# Altium PCB INVERTER_Logic_noCutout.pcbdoc (part 1 of 2)
Units mil, origin at the board's own origin, x right, y up, seen from the top; angles counter-clockwise.
Board outline 4675.98 x 2297.64 mil, 2 copper layers (Top Layer, Bottom Layer), stack 64.567 mil thick; 154 components, 177 nets, 511 pads, 163 vias.
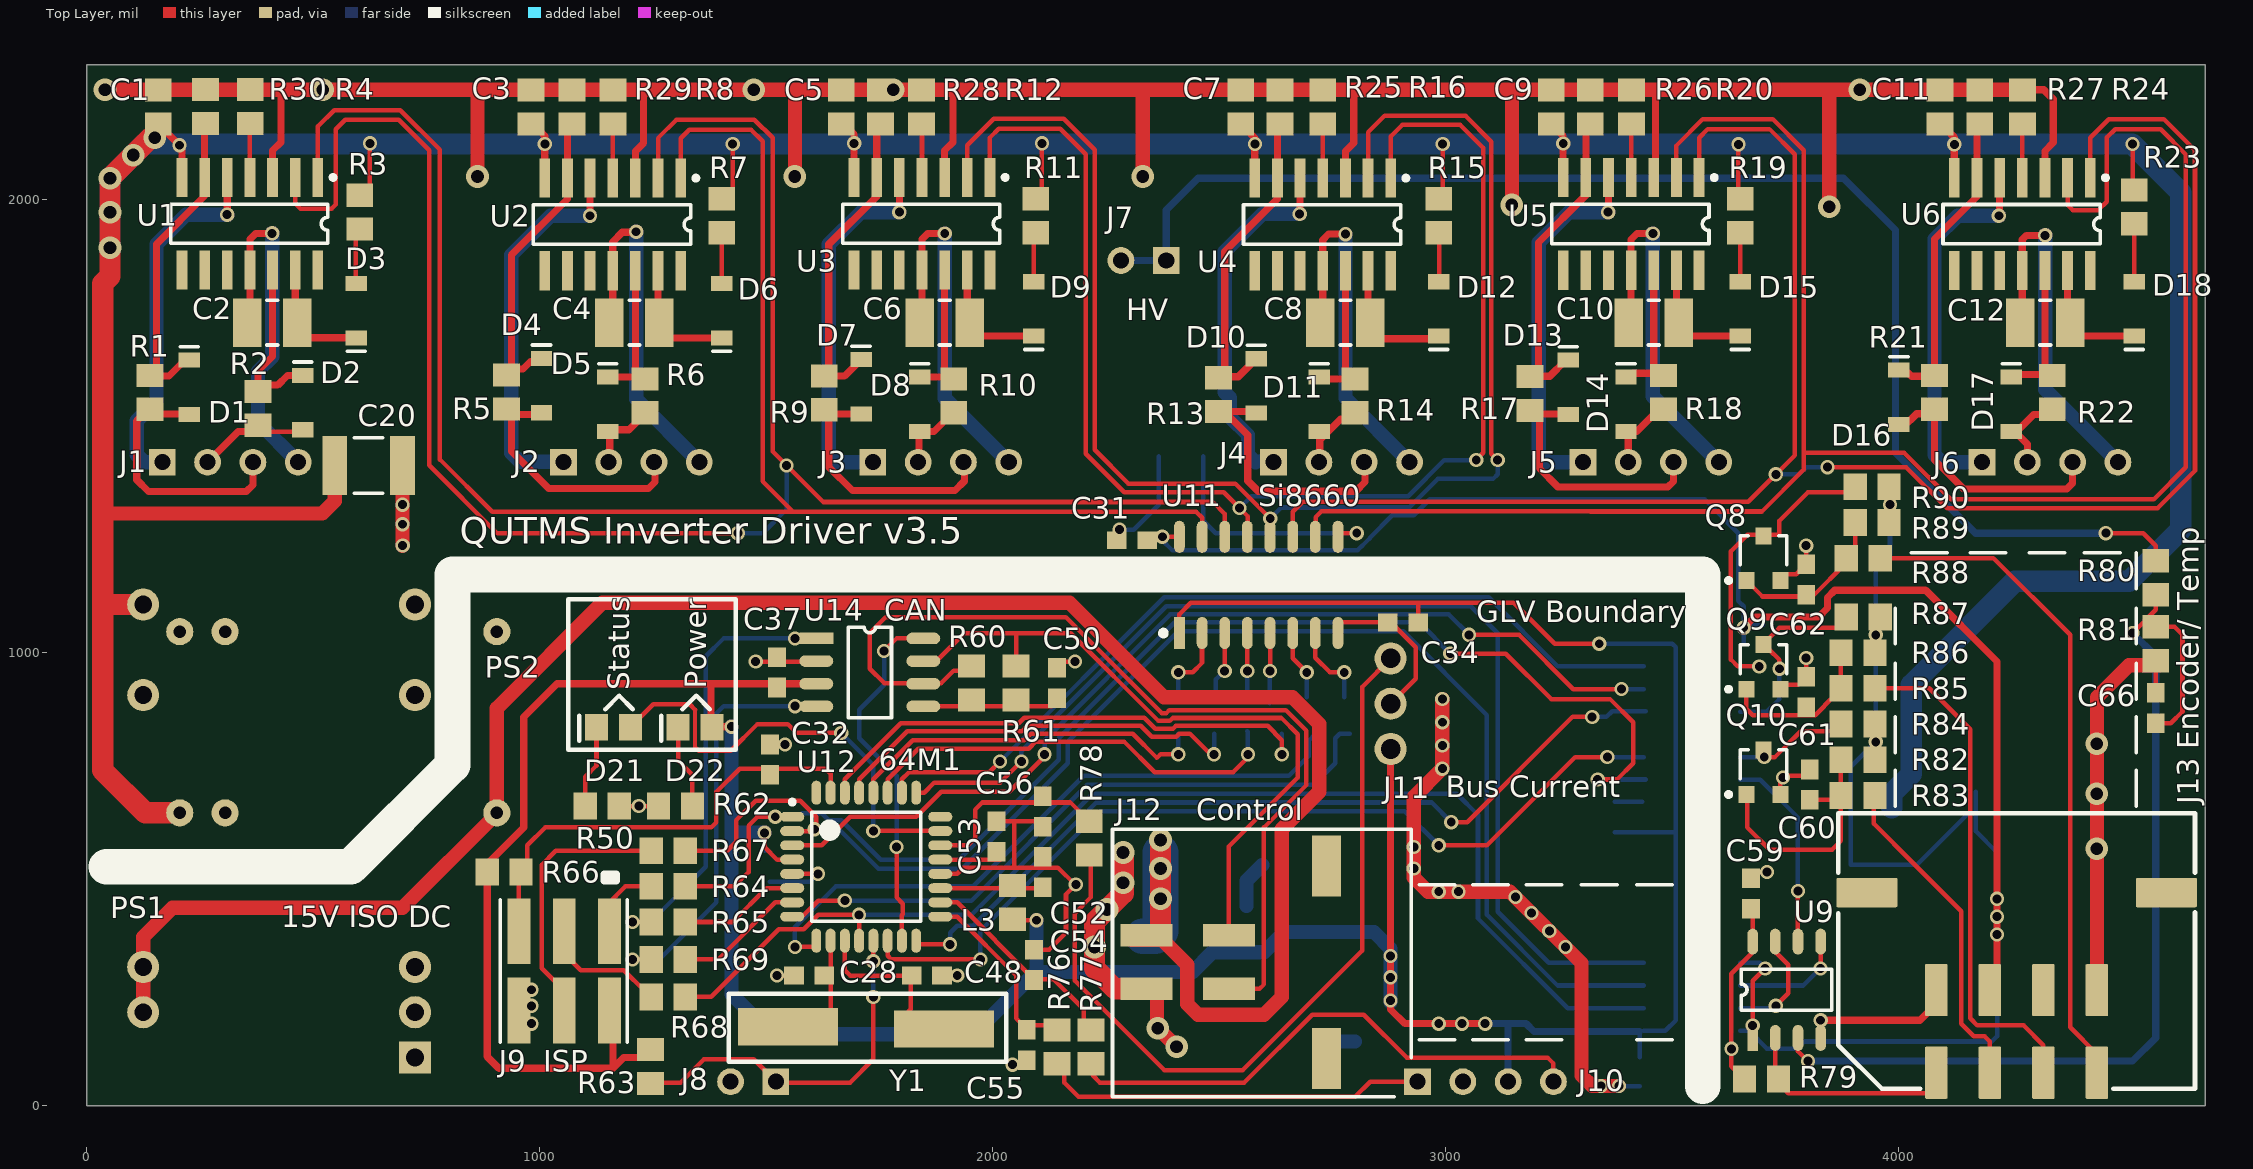
[diagram p0: Top Layer view]
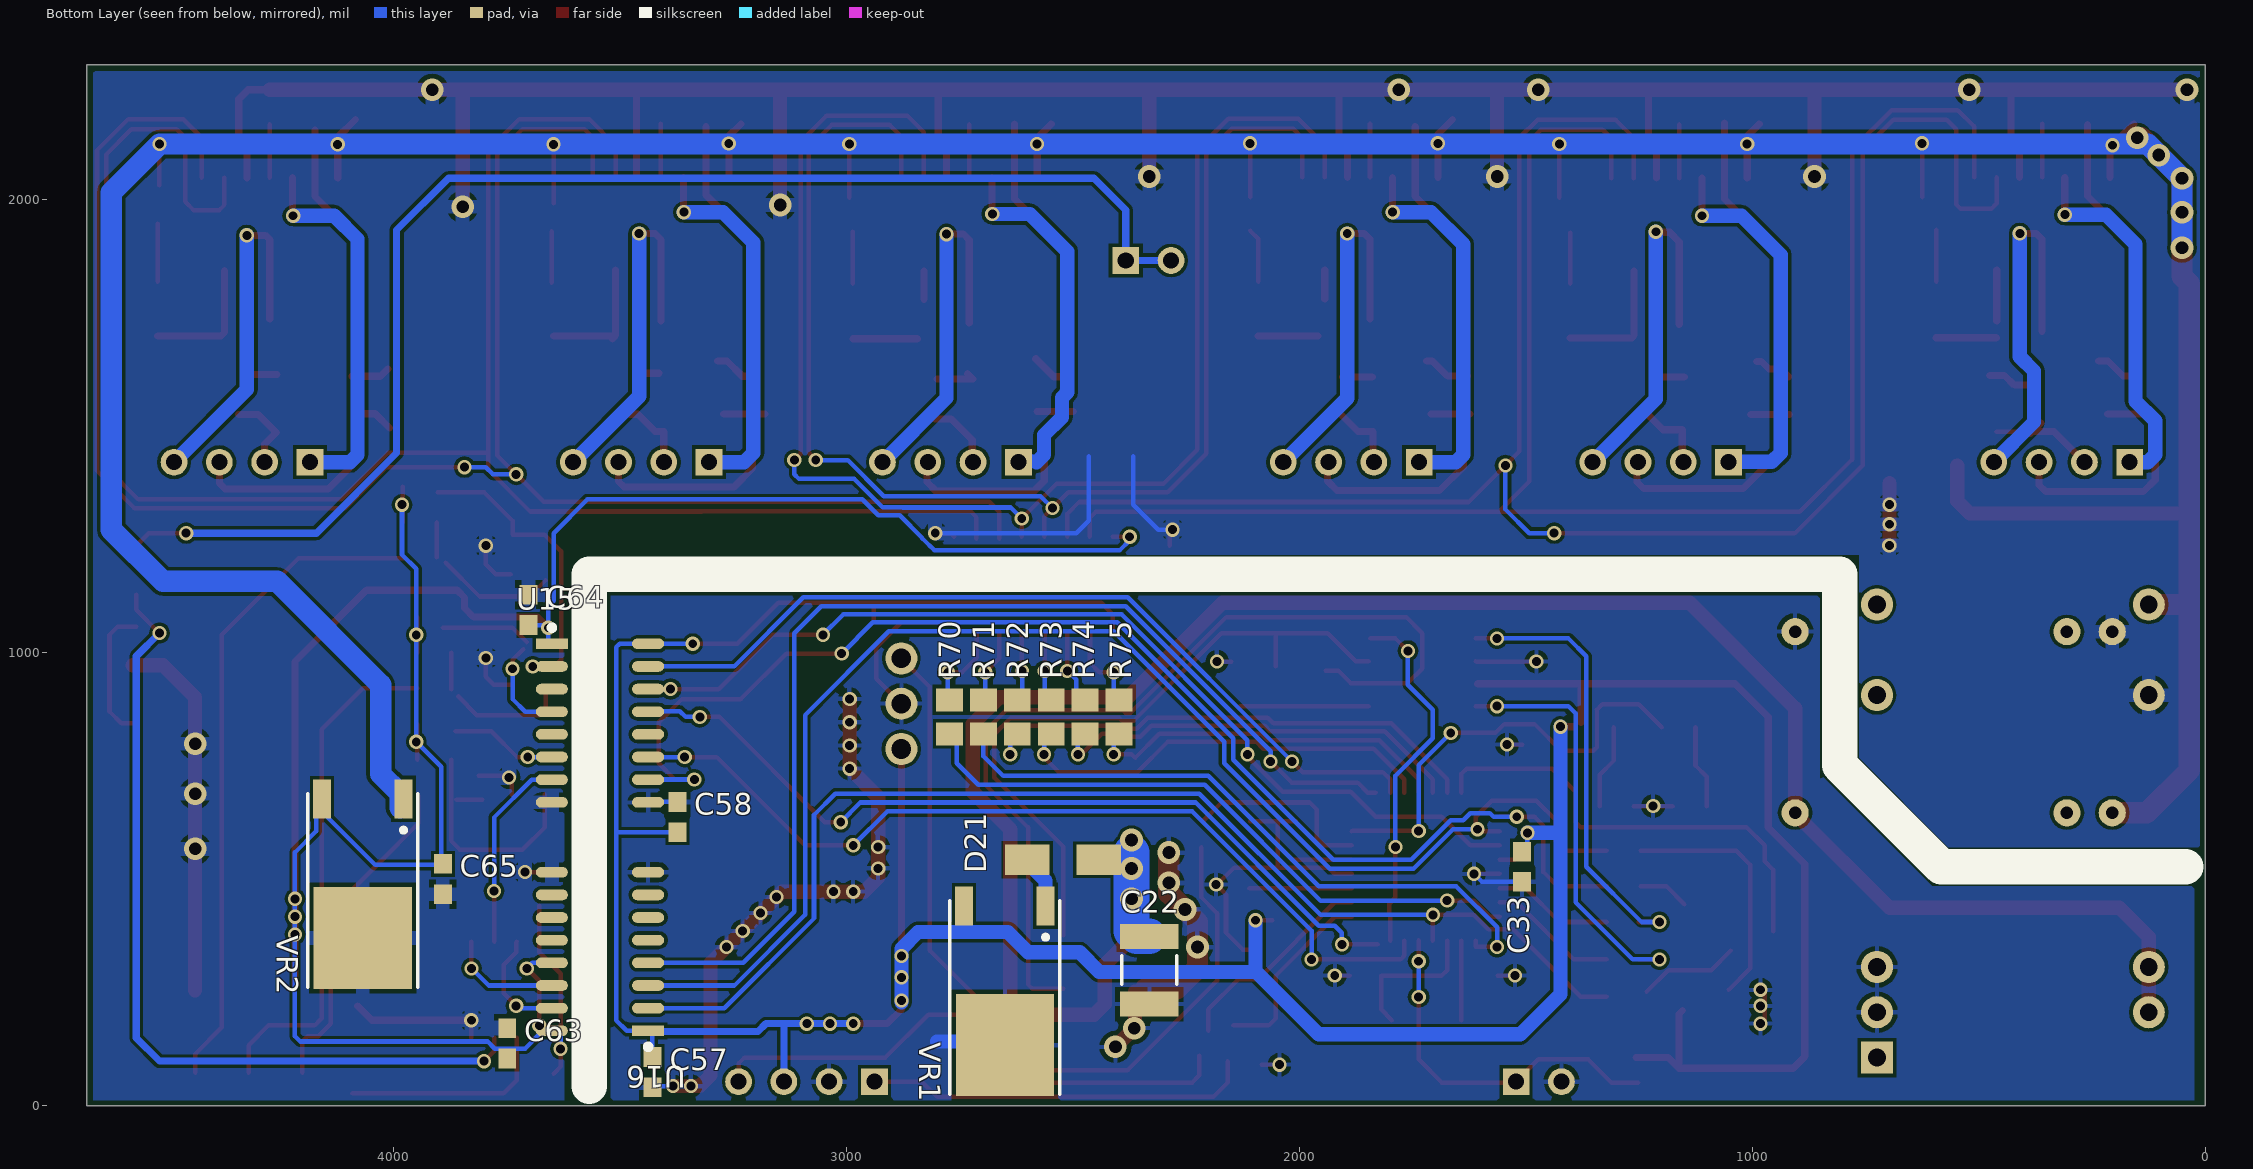
[diagram p1: Bottom Layer view, seen from below]

## Layer stack, top to bottom
Top Solder: solder mask 0.4, Solder Resist, Dk 3.5
Top Layer: signal copper 2.7559
Dielectric1: core 59.0551, FR-4, Dk 4.8
Bottom Layer: signal copper 2.7559
Bottom Solder: solder mask 0.4, Solder Resist, Dk 3.5

## Board outline
0,0 0,2297.64 4675.98,2297.64 4675.98,0

## Design rules (kind name [scope] priority, off if disabled: settings)
Clearance "Shrimp Clear" [InComponent('CS3')] p1: gap=39.37 ignorepadtopadclearanceinfootprint=FALSE except(0: Arc-Hole Track-Hole SMDPad-Hole THPad-Hole Via-Hole Fill-Hole Poly-Hole Region-Hole Text-Hole)
Clearance [All] p2: gap=7.48 ignorepadtopadclearanceinfootprint=FALSE except(0: Arc-Hole Track-Hole SMDPad-Hole THPad-Hole Via-Hole Fill-Hole Poly-Hole Region-Hole Text-Hole)
Height [All] p1: minheight=0 maxheight=1181.1 prefheight=500
HoleSize [All] p1: absolutevalues=TRUE maxlimit=393.7 minlimit=1 maxpercent=80.000 minpercent=20.000
MinimumSolderMaskSliver [All] p1: minsoldermaskwidth=6.3
PlaneClearance [All] p1: clearance=39.37
PlaneConnect [All] p1: planeconnectstyle=Direct reliefexpansion=20 reliefentries=4 reliefconductorwidth=10 reliefairgap=10
PolygonConnect GLV_ground_connect [InNet('GND_GLV')] p1: connectstyle=Relief reliefconductorwidth=10 reliefentries=4 polygonreliefangle="90 Angle" airgapwidth=10
PolygonConnect "Rear Cap Connect" [(InNet('HV_NEG') AND (InComponent('C30') OR InComponent('C31') OR InComponent('C32') OR InComponent('C33') OR InComponent('C34') OR InComponent('C35') OR InComponent('C36') OR InComponent('C37') OR InComponent('C38') OR InComponent('C39') OR InComponent('C40') OR InComponent('C41') OR InComponent('C42') OR InComponent('C43') OR InComponent('C44') OR InComponent('C45') OR InComponent('C46') OR InComponent('C47') OR InComponent('C48') OR InComponent('C49') OR InComponent('C50') OR InComponent('C51') OR InComponent('C52') OR InComponent('C53') OR InComponent('C54') OR InComponent('C55') OR InComponent('C56') OR InComponent('C57')))] p2: connectstyle=Relief reliefconductorwidth=10 reliefentries=4 polygonreliefangle="90 Angle" airgapwidth=10
PolygonConnect [All] p3: connectstyle=Relief reliefconductorwidth=31.5 reliefentries=4 polygonreliefangle="90 Angle" airgapwidth=10
RoutingVias [All] p1: holewidth=19.68 width=31.5 viastyle="Through Hole" minholewidth=19.68 minwidth=31.5 maxholewidth=393.7 maxwidth=393.7
SilkToSilkClearance [All] p1: silktosilkclearance=6.3
SilkToSolderMaskClearance SilkscreenOverComponentPads [IsPad] p1: minsilkscreentomaskgap=6.3 clearancetoexposedcopper=TRUE
SolderMaskExpansion [IsVia] p1: expansion=-39.37
Width [All] p1: maxlimit=393.7 minlimit=7.87 preferedwidth=10
23 further rules are at their usual default settings.

## Components (designator, comment, footprint, x,y, rotation, side; value= is the part's Value field where it differs from the comment)
C1 "0805 1uF cer" 2012[0805]#1 157.48,2204.72 r270 top
C2 "1210 3.3uF 50V" 3225[1210] 409.45,1728.35 r180 top
C3 "0805 1uF cer" 2012[0805]#1 980.32,2204.72 r270 top
C4 "1210 3.3uF 50V" 3225[1210] 1208.66,1728.35 r180 top
C5 "0805 1uF cer" 2012[0805]#1 1665.35,2204.72 r270 top
C6 "1210 3.3uF 50V" 3225[1210] 1893.5,1728.35 r180 top
C7 "0805 1uF cer" 2012[0805]#1 2547.24,2204.72 r270 top
C8 "1210 3.3uF 50V" 3225[1210] 2778.15,1728.35 r180 top
C9 "0805 1uF cer" 2012[0805]#1 3232.28,2204.72 r270 top
C10 "1210 3.3uF 50V" 3225[1210] 3458.86,1728.35 r180 top
C11 "0805 1uF cer" 2012[0805]#1 4090.55,2204.72 r270 top
C12 "1210 3.3uF 50V" 3225[1210] 4322.83,1728.35 r180 top
C20 "Comment" 1812 622.05,1413.39 r0 top
C22 "1812 2.2uF 25V" 1812 2330.71,299.21 r270 bottom
C28 "0603 18pF" 1608[0603] 1594.49,287.4 r0 top
C31 "0603 18pF" 1608[0603] 2307.09,1248.03 r0 top
C32 "0603 18pF" 1608[0603] 1507.87,763.78 r270 top
C33 "0603 18pF" 1608[0603] 1507.87,527.56 r90 bottom
C34 "0603 18pF" 1608[0603] 2905.51,1066.93 r0 top
C37 "Comment" 1608[0603] 1523.62,956.69 r270 top
C48 "0603 18pF" 1608[0603] 1854.33,287.4 r0 top
C50 "Comment" 1608[0603] 2141.73,933.07 r270 top
C52 "Comment" 1608[0603] 2110.24,515.75 r270 top
C53 "Comment" 1608[0603] 2007.87,594.49 r270 top
C54 "Comment" 1608[0603] 2090.55,311.02 r270 top
C55 "Comment" 1608[0603] 2074.8,133.86 r270 top
C56 "Comment" 1608[0603] 2110.24,649.61 r270 top
C57 "Comment" 1608[0603] 3427.56,74.02 r270 bottom
C58 "Comment" 1608[0603] 3372.44,637.01 r270 bottom
C59 "Comment" 1608[0603] 3673.23,468.5 r90 top
C60 "Comment" 1608[0603] 3803.15,708.66 r270 top
C61 "Comment" 1608[0603] 3795.28,913.39 r270 top
C62 "Comment" 1608[0603] 3795.28,1161.42 r270 top
C63 "Comment" 1608[0603] 3748.03,137.8 r270 bottom
C64 "Comment" 1608[0603] 3700.79,1094.49 r270 bottom
C65 "Comment" 1608[0603] 3890.16,500.39 r270 bottom
C66 "Comment" 1608[0603] 4566.93,877.95 r270 top
D1 "RF071M2S" 0402 225.98,1620.47 r270 top
D2 "RF071M2S" 0402 476.38,1586.61 r270 top
D3 "RF071M2S" 0402 594.49,1720.47 r90 top
D4 "RF071M2S" 0402 1003.54,1624.02 r270 top
D5 "RF071M2S" 0402 1149.61,1582.68 r270 top
D6 "RF071M2S" 0402 1401.57,1720.47 r90 top
D7 "RF071M2S" 0402 1709.06,1621.26 r270 top
D8 "RF071M2S" 0402 1838.58,1582.68 r270 top
D9 "RF071M2S" 0402 2090.55,1724.41 r90 top
D10 "RF071M2S" 0402 2581.5,1623.23 r270 top
D11 "RF071M2S" 0402 2720.47,1582.68 r270 top
D12 "RF071M2S" 0402 2984.25,1724.41 r90 top
D13 "RF071M2S" 0402 3270.08,1620.47 r270 top
D14 "RF071M2S" 0402 3397.64,1582.68 r270 top
D15 "RF071M2S" 0402 3649.61,1724.41 r90 top
D16 "RF071M2S" 0402 4000,1598.43 r270 top
D17 "RF071M2S" 0402 4248.03,1582.68 r270 top
D18 "RF071M2S" 0402 4519.69,1724.41 r90 top
D21 "0805 Red LED" 2012[0805]#1 1162.44,835.47 r0 top
D21 "Comment" 2012[0805]#2 2570.87,543.31 r180 bottom
D22 "0805 Grn LED" 2012[0805]#1 1342.44,835.47 r0 top
J1 "A26416-ND" HDR1X4 166.54,1420.47 r0 top locked
J2 "A26416-ND" HDR1X4 1051.97,1420.47 r0 top
J3 "A26416-ND" HDR1X4 1735.04,1420.47 r0 top
J4 "A26416-ND" HDR1X4 2619.69,1420.47 r0 top
J5 "A26416-ND" HDR1X4 3302.36,1420.47 r0 top
J6 "A26416-ND" HDR1X4 4183.46,1420.47 r0 top
J7 "A32932-ND" HDR1X2 2382.68,1865.75 r180 top locked
J8 "A32932-ND" HDR1X2 1520.87,53.15 r180 top locked
J9 "ISP" SOT23-6 1062.99,314.96 r180 top
J10 "A26416-ND" HDR1X4 2937.4,53.15 r0 top locked
J11 "Bus Current" MOLEX_22-05-3081 2877.95,787.4 r180 top locked
J12 "43045-0418" SO8 2811.02,185.24 r90 top locked
J13 "Comment" MOLEX_8PIN_RA_SMD 4259.84,271.65 r0 top
L3 "0805 10uH" 2012[0805]#1 2043.31,448.82 r90 top
PS1 "15V ISO DC" DC/DC_JSE08 555.12,846.46 r270 top
PS2 "Comment" Recom_DIP24 724.41,106.3 r180 top
Q8 "2N7002" SOT-23 3700.79,1208.66 r0 top
Q9 "2N7002" SOT-23 3700.79,968.5 r0 top
Q10 "2N7002" SOT-23 3700.79,736.22 r0 top
R1 "0805 22R" 2012[0805]#1 139.37,1574.8 r270 top
R2 "0805 22R" 2012[0805]#1 377.95,1539.37 r90 top
R3 "0805 10R" 2012[0805]#1 602.36,1972.44 r90 top
R4 "0805 100k" 2012[0805]#1 360.63,2205.51 r90 top
R5 "0805 22R" 2012[0805]#1 926.38,1575.59 r270 top
R6 "0805 22R" 2012[0805]#1 1232.28,1566.93 r90 top
R7 "0805 10R" 2012[0805]#1 1401.57,1964.57 r90 top
R8 "0805 100k" 2012[0805]#1 1161.42,2204.72 r90 top
R9 "0805 22R" 2012[0805]#1 1627.95,1573.62 r270 top
R10 "0805 22R" 2012[0805]#1 1913.39,1566.93 r90 top
R11 "0805 10R" 2012[0805]#1 2094.49,1964.57 r90 top
R12 "0805 100k" 2012[0805]#1 1842.52,2204.72 r90 top
R13 "0805 22R" 2012[0805]#1 2498.03,1569.69 r270 top
R14 "0805 22R" 2012[0805]#1 2799.21,1566.93 r90 top
R15 "0805 10R" 2012[0805]#1 2984.25,1964.57 r90 top
R16 "0805 100k" 2012[0805]#1 2728.35,2204.72 r90 top
R17 "0805 22R" 2012[0805]#1 3185.83,1572.05 r270 top
R18 "0805 22R" 2012[0805]#1 3480.31,1574.8 r90 top
R19 "0805 10R" 2012[0805]#1 3649.61,1964.57 r90 top
R20 "0805 100k" 2012[0805]#1 3409.45,2204.72 r90 top
R21 "0805 22R" 2012[0805]#1 4078.74,1574.8 r270 top
R22 "0805 22R" 2012[0805]#1 4338.58,1574.8 r90 top
R23 "0805 10R" 2012[0805]#1 4519.69,1984.25 r90 top
R24 "0805 100k" 2012[0805]#1 4272.83,2204.72 r90 top
R25 "0805 100k" 2012[0805]#1 2633.86,2204.72 r90 top
R26 "0805 100k" 2012[0805]#1 3318.9,2204.72 r90 top
R27 "0805 100k" 2012[0805]#1 4178.35,2204.72 r90 top
R28 "0805 100k" 2012[0805]#1 1751.97,2204.72 r90 top
R29 "0805 100k" 2012[0805]#1 1070.87,2204.72 r90 top
R30 "0805 100k" 2012[0805]#1 262.2,2205.51 r90 top
R50 "Comment" 2012[0805]#1 1137.8,661.42 r0 top
R60 "Comment" 2012[0805]#1 1952.76,933.07 r270 top
R61 "Comment" 2012[0805]#1 2051.18,933.07 r270 top
R62 "Comment" 2012[0805]#1 1299.21,661.42 r180 top
R63 "0805 270R" 2012[0805]#1 1244.09,86.61 r90 top
R64 "0805 270R" 2012[0805]#1 1283.46,484.25 r180 top
R65 "0805 270R" 2012[0805]#1 1283.46,405.51 r180 top
R66 "0805 270R" 2012[0805]#1 921.26,515.75 r0 top
R67 "0805 270R" 2012[0805]#1 1283.46,562.99 r180 top
R68 "0805 270R" 2012[0805]#1 1283.46,240.16 r180 top
R69 "0805 270R" 2012[0805]#1 1283.46,322.83 r180 top
R70 "Comment" 2012[0805]#1 2771.65,858.27 r90 bottom
R71 "Comment" 2012[0805]#1 2696.85,858.27 r90 bottom
R72 "Comment" 2012[0805]#1 2622.05,858.27 r90 bottom
R73 "Comment" 2012[0805]#1 2547.24,858.27 r90 bottom
R74 "Comment" 2012[0805]#1 2472.44,858.27 r90 bottom
R75 "Comment" 2012[0805]#1 2397.64,858.27 r90 bottom
R76 "Comment" 2012[0805]#1 2141.73,129.92 r270 top
R77 "Comment" 2012[0805]#1 2216.54,129.92 r270 top
R78 "Comment" 2012[0805]#1 2212.6,590.55 r270 top
R79 "Comment" 2012[0805]#1 3696.85,59.06 r180 top
R80 "Comment" 2012[0805]#1 4566.93,1165.35 r90 top
R81 "Comment" 2012[0805]#1 4566.93,1019.68 r90 top
R82 "Comment" 2012[0805]#1 3909.45,763.78 r180 top
R83 "Comment" 2012[0805]#1 3909.45,685.04 r180 top
R84 "Comment" 2012[0805]#1 3909.45,842.52 r180 top
R85 "Comment" 2012[0805]#1 3909.45,921.26 r180 top
R86 "Comment" 2012[0805]#1 3909.45,1000 r180 top
R87 "Comment" 2012[0805]#1 3921.26,1078.74 r180 top
R88 "Comment" 2012[0805]#1 3921.26,1208.66 r180 top
R89 "Comment" 2012[0805]#1 3940.94,1287.4 r180 top
R90 "Comment" 2012[0805]#1 3940.94,1366.14 r180 top
U1 "FAN73933" SOIC16 335.04,1946.85 r180 top
U2 "FAN73933" SOIC16 1135.83,1945.28 r180 top
U3 "FAN73933" SOIC16 1818.5,1946.85 r180 top
U4 "FAN73933" SOIC16 2703.15,1945.28 r180 top
U5 "FAN73933" SOIC16 3383.86,1946.46 r180 top
U6 "FAN73933" SOIC16 4247.24,1946.06 r180 top
U9 "MCP3002" MCP3002_SO8 3677.17,149.61 r90 top
U11 "Si8660" SOP16_SINARROW 2411.81,1043.31 r90 top locked
U12 "64M1" 32A_L 1720.47,527.56 r0 top locked
U14 "CAN" SOP8_TJA1040 1610.24,1031.5 r0 top
U15 "Si8661" SOP16_SINARROW 3649.61,1019.69 r180 bottom
U16 "Si8661" SOP16_SINARROW 3437.01,165.35 r0 bottom
VR1 "78M05" 369A-13 2649.61,279.53 r0 bottom
VR2 "78M05" 369A-13 4066.93,515.75 r0 bottom
Y1 "16MHz ABLS" 2012[0805]#3 1584.92,173.31 r0 top

## Footprints (in the part's own frame and the unit in brackets; to place one, negate y for a bottom-side part, rotate by r counter-clockwise, add the part's x,y. Pads: shape width x height; smd on the part's side, far side on the other; paste and mask are expansions set on the pad)
32A_L [mm] "Thin QFP, 32-Leads, Body 7x7mm, Pitch 0.8mm, IPC High Density"
  oval 1.35x0.55 smd: 1(-4.15,2.8) 2(-4.15,2) 3(-4.15,1.2) 4(-4.15,0.4) 5(-4.15,-0.4) 6(-4.15,-1.2) 7(-4.15,-2) 8(-4.15,-2.8) 17(4.15,-2.8) 18(4.15,-2) 19(4.15,-1.2) 20(4.15,-0.4) 21(4.15,0.4) 22(4.15,1.2) 23(4.15,2) 24(4.15,2.8)
  oval 0.55x1.35 smd: 9(-2.8,-4.15) 10(-2,-4.15) 11(-1.2,-4.15) 12(-0.4,-4.15) 13(0.4,-4.15) 14(1.2,-4.15) 15(2,-4.15) 16(2.8,-4.15) 25(2.8,4.15) 26(2,4.15) 27(1.2,4.15) 28(0.4,4.15) 29(-0.4,4.15) 30(-1.2,4.15) 31(-2,4.15) 32(-2.8,4.15)
  silkscreen extent -4.27,-3.05 3.05,3.75, body extent -3.5,-3.5 3.5,3.5, height 1.2
369A-13 [mm] "TO, Flat Index; 3 In-Line, Axial Leads; Body Dia. 4.6mm; Lead Dia. 0.5 mm (max)"
  rect 1x2.2 smd: 1(-2.285,-4.1) 3(2.285,-4.1)
  rect 5.5x5.7 smd: 4(0,3.7)
  silkscreen extent -3.09,-4.4 3.08,6.45
0402 [mm] "Chip Capacitor; Body 1.0 x 0.5 mm (LxW typ)"
  rect 0.85x1.2 smd: 1(-0.65,0) 2(2.4,0)
  silkscreen extent -1.4,-0.51 -1.4,0.51
1608[0603] [mm] "Chip Capacitor; Body 1.6 x 0.8 mm (LxW typ)"
  rect 1.1x1 smd: 1(-0.85,0) 2(0.85,0)
1812 [mm] "Chip Capacitor, Body 4.5x3.2mm, IPC High Density"
  rect 1.4x3.3 smd: 1(-1.9,0) 2(1.9,0)
  silkscreen extent -0.8,-1.55 0.8,1.55, body extent -2.4,-1.7 2.4,1.7, height 1.4
2012[0805]#1 [mm] "Chip Resistor; Body 2.0 x 1.3 mm (LxW typ)"
  rect 1.3x1.5 smd: 1(-0.95,0) 2(0.95,0)
2012[0805]#2 [mm] "Chip Resistor; Body 2.0 x 1.3 mm (LxW typ)"
  rect 2.5x1.7 smd: 1(-0.74,-0.004) 2(3.26,-0.004)
2012[0805]#3 [mm] "Crystal, Thru-Hole; 2 Leads; Body 3.1 x 8.2 mm (Dia.xH)"
  rect 5.6x2.1 smd: 1(-0.95,0.025) 2(7.8,-0.1)
3225[1210] [mm] "Chip Resistor; Body 3.2 x 2.5 mm (LxW typ)"
  rect 1.6x2.7 smd: 1(-1.4,0) 2(1.4,0)
  silkscreen extent -0.3,-1.25 0.3,1.25
DC/DC_JSE08 [mil]
  round 60 hole 27.56: 1(-200,350) 7(-200,-250) 8(-200,-350) 9(200,-350) 10(200,-250) 16(200,350)
  body extent -273,-470 272,470, height 319
HDR1X2 [mm] "Connector; Header; 2 Position"
  rect 1.5x1.5 hole 0.9: 1(0,0)
  round 1.5 hole 0.9: 2(2.54,0)
HDR1X4 [mm] "Connector; Header; 4 Position"
  rect 1.5x1.5 hole 0.9: 1(0,0)
  round 1.5 hole 0.9: 2(2.54,0) 3(5.08,0) 4(7.62,0)
MCP3002_SO8 [mm]
  rect 1.45x0.6 smd: 1(0,0)
  oval 1.45x0.6 smd: 2(0,-1.27) 3(0,-2.54) 4(0,-3.81) 5(5.4,-3.81) 6(5.4,-2.54) 7(5.4,-1.27) 8(5.4,0)
  silkscreen extent 1.56,-4.44 3.84,0.64, body extent -0.4,-4.4 5.8,0.6, height 1.75
MOLEX_8PIN_RA_SMD [mm]
  rrect10% 1.27x2.92 smd: 1(-4.5,-0.42) 2(-1.5,-0.42) 3(1.5,-0.42) 4(4.5,-0.42) 5(-4.5,-5.05) 6(-1.5,-5.05) 7(1.5,-5.05) 8(4.5,-5.05)
  rrect10% 3.43x1.65 smd: ""(-8.395,5.05) ""(8.395,5.05)
  silkscreen extent -10,-5.95 10,9.5, body extent -9.82,-5.77 9.83,9.63, height 8.78
MOLEX_22-05-3081 [mm]
  round 1.8 hole 1.1: 1(0,0) 2(0,-2.54) 3(0,-5.08)
  body extent -12.63,-6.27 0.3,1.2, height 6.38
Recom_DIP24 [mm] "945-1367-ND"
  rect 1.8x1.8 hole 1: 1(0,0)
  round 1.8 hole 1: 2(0,-2.54) 3(0,-5.08) 9(0,-20.32) 11(0,-25.4) 14(15.24,-25.4) 16(15.24,-20.32) 22(15.24,-5.08) 23(15.24,-2.54)
  body extent -2.27,-29.92 17.75,2.02, height 10.2
SO8 [mm] "SOP, 8-Leads, Body 5.3x5.3mm, Pitch 1.27mm, IPC High Density"
  rect 1.27x2.92 smd: 1(4.844,7.366) 2(1.844,7.366) 3(4.844,11.996) 4(1.844,11.996)
  rect 3.43x1.65 smd: ""(-2.051,1.896) ""(8.739,1.896)
  silkscreen extent -4.19,-2.87 10.79,13.9
SOIC16 [mm] "Small Outline; 16 Leads; Body Width 3.9 mm; Pitch 1.27 mm"
  rect 0.6x2.2 smd: 1(-4.445,-2.6) 2(-3.175,-2.6) 3(-1.905,-2.6) 4(-0.635,-2.6) 5(0.635,-2.6) 6(1.905,-2.6) 7(3.175,-2.6) 8(3.175,2.6) 9(1.905,2.6) 10(0.635,2.6) 11(-0.635,2.6) 12(-1.905,2.6) 13(-3.175,2.6) 14(-4.445,2.6)
  silkscreen extent -5.42,-2.72 3.81,1.1
SOP8_TJA1040 [mm]
  rect 1.9x0.65 smd: 1(0,0)
  oval 1.9x0.65 smd: 2(0,-1.27) 3(0,-2.54) 4(0,-3.81) 5(6,-3.81) 6(6,-2.54) 7(6,-1.27) 8(6,0)
  silkscreen extent 1.78,-4.44 4.22,0.64, body extent -0.17,-4.4 6.03,0.6, height 1.75
SOP16_SINARROW [mm]
  rect 1.8x0.6 smd: 1(0,0)
  oval 1.8x0.6 smd: 2(0,-1.27) 3(0,-2.54) 4(0,-3.81) 5(0,-5.08) 6(0,-6.35) 7(0,-7.62) 8(0,-8.89) 9(5.4,-8.89) 10(5.4,-7.62) 11(5.4,-6.35) 12(5.4,-5.08) 13(5.4,-3.81) 14(5.4,-2.54) 15(5.4,-1.27) 16(5.4,0)
  silkscreen extent -0.1,0.8 0.1,1, body extent -0.38,-9.54 5.78,0.54, height 2
SOT23-6 [mm] "SOT-23/SC-74A; 5 Leads; Body 3.1 x 3 mm, inc. leads (LxW max)"
  rect 1.27x3.68 smd: 1(-2.308,-1.78) 2(-2.308,2.66) 3(0.232,-1.78) 4(0.232,2.66) 5(2.772,-1.78) 6(2.772,2.66)
  silkscreen extent -3.3,-3.56 3.81,4.45
SOT-23 [mm] "SOT-23; 3 Leads; Body 3.0 x 2.6 mm, inc. leads (LxW max)"
  rect 0.9x0.95 smd: 1(-0.95,-1.25) 2(0.95,-1.25) 3(0,1.25)
  silkscreen extent -2.07,-1.37 1.3,1.25

## Part data
C20 C22: library part "Cap Pol3"
J1 J2 J3 J4 J5 J6 J10: library part "Header 4"
J7 J8: library part "Header 2"
J12: library part "SW DIP-4"
J13: library part 8_pin_header
PS1: library part DC_DC_JSE08
U11 U15 U16: library part Si-8660
U12: library part ATtiny28L-4AI
U14: library part TJA1040
Y1: library part "Res Semi"

## Via types
v1: diameter 31.5, hole 19.68, Top Layer to Bottom Layer, 136 vias
v2: diameter 50, hole 28, Top Layer to Bottom Layer, 27 vias

## Nets (pads, with @x,y where several pads share a name; then routed paths per layer and width w, separated by ;. In a path a pad name is that pad's centre, name@x,y a point inside that pad or via, vN(x,y) a via of type N, cw(c..) or ccw(c..) an arc to the next point about the centre after c; other vN are vias at no path point)
5V_GLV: C33.2 C34.2 C37.2 C57.1 C58.2 D22.2 J9.2 J10.3 J11.1 L3.1 R63.2 R66.1 U11.1 U12.4 U14.3 U15.16 U16.1 VR1.3 | length 8484.4
  Top Layer w10: D22.2@1377.95,846.46 D22.2@1379.84,848.35 ; v1(1496.06,602.36) 1496.06,570.87 1523.62,543.31 U12.4@1557.09,543.31 ; L3.1@2059.06,409.45 v1(2096.46,409.45) ; U11.1@2411.81,1043.31 2411.81,1085.04 2437.01,1110.24 3149.61,1110.24 3240.16,1019.69 v1(3338.58,1019.69) ; C34.2@2938.98,1066.93 2938.98,1108.27
  Top Layer w15.75: J9.2@1153.86,210.24 1161.42,202.68 1161.42,82.68 ; R63.2@1255.91,106.3 1185.04,106.3 1161.42,82.68 ; D22.2@1377.95,846.46 1377.95,929.13 ; D22.2@1391.77,836.65 v1(1423.19,836.65) ; U14.3@1606.3,931.5 1037.8,931.5 964.57,858.27 964.57,614.17 883.86,533.46 883.86,108.27 909.45,82.68 1161.42,82.68 ; J11.1@2877.95,787.4 2877.95,212.6 2909.45,181.1 v1(3086.61,181.1)
  Bottom Layer w10: C33.2@1496.06,562.99 v1(1496.06,602.36) ; v1(3338.58,1019.69) 3500,1019.69 3507.87,1011.81 3507.87,188.98 3484.25,165.35 U16.1@3437.01,165.35 ; C58.2@3372.44,603.54 3506.69,603.54 ; C57.1@3427.56,107.48 U16.1@3427.56,163.78
  Bottom Layer w15.75: v1(2984.25,181.1) 3137.4,181.1 ; J10.3@3129.92,59.06 3137.4,51.57 3137.4,181.1 ; U16.1@3427.56,163.78 3194.49,163.78 3177.17,181.1 3137.4,181.1
  Bottom Layer w31.5: v1(1423.19,836.65) 1423.19,602.36 ; v1(1496.06,602.36) 1423.19,602.36 ; v1(2096.46,409.45) 2096.46,297.24 2094.49,295.28 ; v1@2877.95,228.35 v1(2877.95,232.28) 2877.95,346.46 2841.09,383.32 2643.16,383.32 2598.43,338.58 2484.25,338.58 2440.94,295.28 2094.49,295.28 ; 1423.19,602.36 1423.19,246.1 1511.81,157.48 1956.69,157.48 2094.49,295.28
  other v1: 3035.43,181.1 2877.95,283.46 2877.95,330.71
5V_HV: C31.2 C59.1 C63.2 C64.2 C65.1 J13.2 R79.2 R82.1 R84.1 R86.1 R87.1 R89.1 R90.1 U9.1 U9.8 U11.16 U15.1 U16.13 U16.16 VR2.3 | length 6257.6
  Top Layer w10: v1(2374.02,1255.91) U11.16@2411.81,1255.91 ; R79.2@3645.67,70.87 3629.92,86.61 3629.92,291.34 3677.17,338.58 C59.1@3677.17,440.94 ; U9.1@3677.17,149.61 3677.17,275.59 v1(3704.72,303.15) ; R82.1@3946.85,763.78 R84.1@3946.85,842.52 ; R86.1@3946.85,1000 R87.1@3946.85,1078.74 ; R89.1@3978.35,1287.4 R90.1@3978.35,1366.14
  Top Layer w15.75: v1(3657.48,1055.12) 3681.1,1078.74 3822.83,1078.74 3842.52,1098.43 3842.52,1122.05 3858.27,1137.8 4059.06,1137.8 4216.54,980.31 J13.2@4216.54,266.93
  Bottom Layer w10: v1(2374.02,1255.91) 2374.02,1248.03 2395.43,1226.61 2805.35,1226.61 2814.29,1235.55 2814.84,1235.55 2831.38,1252.09 2831.38,1252.64 2881.89,1303.15 2929.13,1303.15 2964.57,1338.58 3570.87,1338.58 3645.67,1263.78 3645.67,1114.17 3657.48,1102.36 v1(3657.48,1055.12) ; v1(3630.31,125.59) U16.16@3630.31,157.87 ; U16.16@3649.61,165.35 3669.29,165.35 3708.66,125.98 3775.59,125.98 3791.34,141.73 4204.72,141.73 4216.54,153.54 4216.54,559.06 4169.29,606.3 VR2.3@4169.29,692.91 ; U16.13@3649.61,315.35 3692.52,315.35 v1(3704.72,303.15) ; U15.1@3657.48,1023.62 3657.48,1047.4 3671.1,1061.02 C64.2@3700.79,1061.02 ; v1(3980.31,1326.77) 3980.31,1216.54 3948.82,1185.04 v1(3948.82,803.15) 3893.7,748.03 3893.7,531.5 4039.37,531.5 VR2.3@4153.54,645.67
  other v1: 3677.17,177.17 4216.54,377.95 4216.54,417.32 4216.54,456.69 3948.82,1039.37
12V_GLV: C22.1 D21.2@2442.52,543.15 J12.3 PS1.16 PS2.22 PS2.23 | length 4839.2
  Top Layer w31.5: PS2.23@124.41,206.3 124.41,372.44 188.98,437.01 696.85,437.01 905.12,645.28 905.12,877.56 1137.8,1110.24 2169.29,1110.24 2377.95,901.57 2661.42,901.57 2720.47,842.52 2720.47,692.91 2637.8,610.24 2637.8,240.16 2598.43,200.79 2452.76,200.79 2429.13,224.41 2429.13,311.02 J12.3@2366.14,374.02
  Top Layer w47.24: J12.3@2307.09,374.02 J12.3@2366.14,374.02 ; J12.3@2370.08,385.83 v2(2370.08,586.61)
  Bottom Layer w78.74: C22.1@2330.71,374.02 2358.27,374.02 2370.08,385.83 2370.08,559.06
  other v2: 2370.08,456.69 2370.08,523.62
12V_reg: D21.1@2600,543.15 VR1.1 | length 105
  Bottom Layer w31.5: VR1.1@2559.65,440.94 2559.65,496.65 D21.1@2594.49,531.5
15V: C1.2 C3.2 C5.2 C7.2 C9.2 C11.2 C20.1 PS1.9 PS2.14 R3.2 R7.2 R11.2 R15.2 R19.2 R23.2 U1.7 U2.7 U3.7 U4.7 U5.7 U6.7 VR2.1 | length 10421.1
  Top Layer w10: R3.2@624.8,2005.91 v1(624.8,2124.41) ; R7.2@1425.59,2004.33 v1(1425.59,2122.83) ; R11.2@2108.27,2005.91 v1(2108.27,2124.41) ; R15.2@2992.91,2004.33 v1(2992.91,2122.83) ; R19.2@3645.67,1992.13 v1(3645.67,2122.05) ; R23.2@4515.75,2031.5 v1(4515.75,2122.83)
  Top Layer w15.75: C1.2@157.48,2167.32 210.04,2114.76 U1.7@210.04,2049.21 ; C3.2@984.25,2167.32 1010.83,2140.75 U2.7@1010.83,2047.64 ; C5.2@1661.42,2177.17 1693.5,2145.08 U3.7@1693.5,2049.21 ; C7.2@2547.24,2167.32 2578.15,2136.42 U4.7@2578.15,2047.64 ; C9.2@3232.28,2167.32 3258.86,2140.75 U5.7@3258.86,2048.82 ; C11.2@4082.68,2177.17 4122.24,2137.6 U6.7@4122.24,2048.43
  Top Layer w31.5: 35.43,1307.09 519.68,1307.09 547.24,1334.65 C20.1@547.24,1413.39
  Top Layer w47.24: 47.24,1106.3 PS2.14@124.41,1106.3 ; v2(149.61,2136.81) 140.75,2136.81 v2(51.18,2047.24) v2(51.18,1893.7) 51.18,1830.71 35.43,1814.96 35.43,740.16 129.13,646.46 PS1.9@205.12,646.46
  Bottom Layer w47.24: v2(51.18,1893.7) v2(51.18,2047.24) 126.77,2122.83 v1(2578.35,2122.83) 4514.96,2122.83 4622.05,2015.75 4622.05,1271.65 4507.87,1157.48 4255.91,1157.48 4027.56,929.13 4027.56,732.28 3984.25,688.98 VR2.1@3984.25,657.48
  other v1: 204.72,2120.08 1011.02,2122.83 4122.24,2122.05 1693.7,2124.41 3259.06,2124.02
  other v2: 51.18,1972.44 102.36,2098.43
ADC_CS: U12.25 U16.4 | length 2476.4
  Top Layer w10: U12.25@1830.71,690.95 1848.43,690.95 1870.08,712.6 2015.75,712.6 v1(2062.99,759.84)
  Bottom Layer w10: v1(2062.99,759.84) 2062.99,782.37 2382.99,1102.36 3055.12,1102.36 3114.17,1043.31 3114.17,427.88 3226.69,315.35 U16.4@3437.01,315.35
AGND: 
ANODE1: 
ANODE2: 
Aref: C53.2 U12.21 | length 131.9
  Top Layer w10: U12.21@1883.86,543.31 C53.2@2015.75,543.31
AVCC: C52.2 L3.2 U12.19 | length 226.4
  Top Layer w10: U12.19@1883.86,480.32 C52.2@2110.24,480.32
CAN_HI: J12.1 R61.1 U14.7 | length 1530
  Top Layer w10: U14.7@1846.46,981.5 1875.2,981.5 1937.01,1043.31 2171.58,1043.31 2365.54,849.34 2390.36,849.34 2396.89,855.87 2636.98,855.87 2673.23,819.62 2673.23,724.41 2521.02,572.2 J12.1@2521.02,375.94 ; R61.1@2051.18,970.47 2051.18,1043.31
CAN_LO: J12.2 R60.1 U14.6 | length 2083.9
  Top Layer w10: R60.1@1940.94,960.63 1913.39,960.63 1885.83,933.07 1759.84,933.07 1728.35,964.57 1728.35,1043.31 1763.78,1078.74 2160.87,1078.74 2372.78,866.82 2383.12,866.82 2389.65,873.35 2646.34,873.35 2692.21,827.48 2692.21,707.95 2598.43,614.17 2598.43,267.72 2588.54,257.83 J12.2@2521.02,257.83
CAN_SPLIT: C50.2 R60.2 R61.2 U14.5 | length 283.1
  Top Layer w10: U14.5@1846.46,881.5 C50.2@2129.53,881.5
CS_HV: 
DTR_A: R4.1 U1.4 | length 118.3
  Top Layer w10: U1.4@360.04,2049.21 R4.1@360.04,2167.52
DTR_B: R8.1 U2.4 | length 118.3
  Top Layer w10: U2.4@1160.83,2047.64 R8.1@1160.83,2165.94
DTR_C: R12.1 U3.4 | length 118.3
  Top Layer w10: U3.4@1843.5,2049.21 R12.1@1843.5,2167.52
DTR_D: R16.1 U4.4 | length 118.3
  Top Layer w10: U4.4@2728.15,2047.64 R16.1@2728.15,2165.94
DTR_E: R20.1 U5.4 | length 118.3
  Top Layer w10: U5.4@3408.86,2048.82 R20.1@3408.86,2167.13
DTR_F: R24.1 U6.4 | length 118.3
  Top Layer w10: U6.4@4272.24,2048.43 R24.1@4272.24,2166.73
FBin: 
FBout: 
gate_U_HI_A: D2.2 J1.2 R2.1 | length 249.8
  Top Layer w10: R2.1@393.7,1488.19 D2.2@460.63,1488.19
  Top Layer w15.75: J1.2@266.54,1420.47 334.25,1488.19 377.95,1488.19 R2.1@385.83,1496.06 ; R2.1@362.99,1507.09 R2.1@385.83,1484.25
gate_U_HI_B: D5.2 J2.2 R6.1 | length 177.3
  Top Layer w15.75: J2.2@1154.33,1419.29 1154.33,1492.13 1196.85,1492.13 1232.28,1527.56 R6.1@1232.28,1539.37
gate_U_LO_A: D1.2 J1.3 R1.2 | length 572
  Top Layer w15.75: R1.2@129.92,1527.17 D1.2@215.75,1527.17 ; R1.2@133.66,1535.24 110.24,1511.81 110.24,1381.89 136.22,1355.91 351.97,1355.91 366.54,1370.47 J1.3@366.54,1420.47
gate_U_LO_B: D4.2 J2.3 R5.2 | length 584.4
  Top Layer w15.75: R5.2@917.32,1525.59 D4.2@1003.54,1525.59 ; R5.2@937.8,1543.31 937.8,1444.09 1019.69,1362.2 1239.76,1362.2 1254.33,1376.77 J2.3@1254.33,1419.29
gate_V_HI_A: D8.2 J3.2 R10.1 | length 148.9
  Top Layer w15.75: J3.2@1837.01,1420.87 D8.2@1837.01,1488.19 ; D8.2@1838.58,1488.19 1870.08,1488.19 R10.1@1905.51,1523.62
gate_V_HI_B: D11.2 J4.2 R14.1 | length 151
  Top Layer w15.75: J4.2@2721.65,1419.29 2721.65,1469.69 2767.72,1515.75 R14.1@2803.15,1515.75
gate_V_LO_A: D7.2 J3.3 R9.2 | length 582.9
  Top Layer w15.75: R9.2@1623.23,1527.17 D7.2@1709.06,1527.17 ; R9.2@1637.8,1535.43 1637.8,1410.24 1690.16,1357.87 1916.54,1357.87 1937.01,1378.35 J3.3@1937.01,1420.87
gate_V_LO_B: D10.2 J4.3 R13.2 | length 565.5
  Top Layer w15.75: R13.2@2498.03,1532.28 D10.2@2577.95,1532.28 ; R13.2@2516.54,1526.38 2562.6,1480.31 2562.6,1379.53 2585.83,1356.3 2801.18,1356.3 2821.65,1376.77 J4.3@2821.65,1419.29
gate_W_HI_A: D14.2 J5.2 R18.1 | length 155.2
  Top Layer w15.75: J5.2@3402.36,1420.47 D14.2@3402.36,1488.19 ; D14.2@3405.51,1488.19 3421.26,1488.19 3459.45,1526.38 R18.1@3477.17,1526.38
gate_W_HI_B: D17.2 J6.2 R22.1 | length 175.5
  Top Layer w15.75: J6.2@4283.46,1420.47 4283.46,1460.63 4257.87,1486.22 4297.64,1525.98 R22.1@4340.55,1525.98
gate_W_LO_A: D13.2 J5.3 R17.2 | length 560.7
  Top Layer w15.75: R17.2@3179.13,1526.77 D13.2@3270.08,1526.77 ; R17.2@3206.3,1516.14 3206.3,1406.69 3246.85,1366.14 3490.55,1366.14 3502.36,1377.95 J5.3@3502.36,1420.47
gate_W_LO_B: D16.2 J6.3 R21.2 | length 575
  Top Layer w15.75: D16.2@4007.87,1496.06 4039.37,1527.56 4082.68,1527.56 4078.74,1523.62 4078.74,1425.2 4142.91,1361.02 4370.47,1361.02 4383.46,1374.02 J6.3@4383.46,1420.47
gearbox_temp_a: 
gearbox_temp_b: J13.5 R79.1 U9.2 | length 468.6
  Top Layer w10: U9.2@3727.17,149.61 3727.17,56.3 3755.91,27.56 J13.5@4090.55,27.56
GND_A: J1.1 U1.5 | length 810.7
  Top Layer w15.75: v1@310.04,1967.52 U1.5@310.04,2049.21
  Bottom Layer w31.5: J1.1@166.54,1420.47 126.77,1420.47 110.24,1437.01 110.24,1511.81 153.54,1555.12 153.54,1901.57 218.9,1966.93 v1(309.84,1966.93)
GND_B: J2.1 U2.5 | length 852.6
  Top Layer w15.75: J2.1@1051.18,1421.26 J2.1@1051.97,1420.47 ; v1(1110.83,1964.57) U2.5@1110.83,2047.64
  Bottom Layer w31.5: J2.1@1051.18,1421.26 956.69,1421.26 937.01,1440.94 937.01,1877.95 1023.62,1964.57 v1@1110.24,1964.57
GND_C: J3.1 U3.5 | length 830.5
  Top Layer w15.75: v1(1793.5,1972.44) U3.5@1793.5,2049.21
  Bottom Layer w31.5: J3.1@1735.04,1420.47 1654.33,1420.47 1637.8,1437.01 1637.8,1901.57 1708.66,1972.44 v1(1793.5,1972.44)
GND_D: J4.1 U4.5 | length 807.8
  Top Layer w15.75: v1@2678.15,1968.5 U4.5@2678.15,2047.64
  Bottom Layer w31.5: J4.1@2614.17,1429.13 2579.53,1420.47 2562.99,1437.01 2562.99,1480.31 2523.62,1519.69 2523.62,1562.99 2511.81,1574.8 2511.81,1885.83 2594.49,1968.5 v1(2677.17,1968.5)
GND_E: J5.1 U5.5 | length 828.3
  Top Layer w15.75: v1@3358.86,1972.44 U5.5@3358.86,2048.82
  Bottom Layer w31.5: J5.1@3302.36,1420.47 3225.2,1420.47 3204.72,1440.94 3204.72,1905.51 3271.65,1972.44 v1(3358.27,1972.44)
GND_F: J6.1 U6.5 | length 834.7
  Top Layer w15.75: v1@4222.24,1964.57 U6.5@4222.24,2048.43
  Bottom Layer w31.5: J6.1@4183.46,1420.47 4095.28,1420.47 4078.74,1437.01 4078.74,1913.39 4129.92,1964.57 v1(4220.47,1964.57)
GND_GLV: C22.2 C28.1 C32.1 C33.1 C34.1 C37.1 C48.2 C50.1 C52.1 C53.1 C54.1 C55.2 C56.2 C57.2 C58.1 J8.2 J9.6 J10.2 J11.2 J12.4 PS1.1 PS2.2 PS2.3 R50.2 R62.2 U11.8 U12.5 U12.20 U14.2 U15.9 U16.8 VR1.4 | length 3690.4
  Top Layer w10: v1(981.42,181.1) 972.44,190.08 972.44,246.93 v1(981.42,255.91) ; R50.2@1175.2,661.42 R62.2@1261.81,661.42 ; v1(1476.38,980.31) 1609.06,980.31 U14.2@1610.24,981.5 ; C32.1@1507.87,797.24 v1(1541.34,797.24) ; v1(1523.62,287.4) C28.1@1561.02,287.4 ; U12.5@1557.09,511.81 v1(1614.17,511.81) ; U12.20@1883.86,511.81 1921.26,511.81 1935.04,525.59 2047.24,525.59 ; C48.2@1887.79,287.4 v1(1921.26,287.4) ; C53.1@2007.87,627.95 2047.24,627.95 ; v1(2043.31,90.55) C55.2@2082.68,90.55 ; C54.1@2090.55,344.49 2124.02,344.49 2161.42,381.89 2161.42,466.54 v1(2183.07,488.19) 2181.1,488.19 2143.7,525.59 2047.24,525.59 ; C56.2@2108.27,627.95 2047.24,627.95 ; C50.1@2149.61,980.31 v1(2181.1,980.31) ; U11.8@2759.84,1066.93 2877.95,1066.93 2933.07,1011.81 2933.07,942.52 J11.2@2877.95,887.4 ; 2047.24,525.59 2047.24,627.95
  Top Layer w31.5: J12.4@2362.2,251.97 2362.2,173.23 v2(2405.51,129.92) ; v1(2992.13,897.64) v1(2992.13,744.09) 2929.13,681.1 2929.13,503.94 2960.63,472.44 3141.73,472.44 3299.21,314.96 3299.21,66.93 3322.83,43.31 v1(3381.89,43.31)
  Top Layer w47.24: v2(2287.4,559.06) 2287.4,468.5 2224.41,405.51 2224.41,303.15 2269.72,257.83 J12.4@2338.74,257.83
  Bottom Layer w10: C33.1@1507.87,494.1 1596.46,494.1 v1(1614.17,511.81) ; v1(3342.52,43.31) C57.2@3427.56,43.31 ; C58.1@3372.44,670.47 U15.9@3433.86,670.47
  Bottom Layer w31.5: VR1.4@2736.22,141.73 2799.21,141.73
  other v1: 981.42,220.47 3263.78,350.39 3228.35,385.83 3188.98,425.2 3153.54,460.63 2984.25,472.44 3027.56,472.44 2929.13,523.62 2929.13,570.87 1218.5,661.42 2992.13,795.28 2992.13,846.46
  other v2: 2364.17,171.26 2224.41,350.39 2251.97,433.07 2287.4,492.13